# EAGLE board preampli (EAGLE 7.2.0)
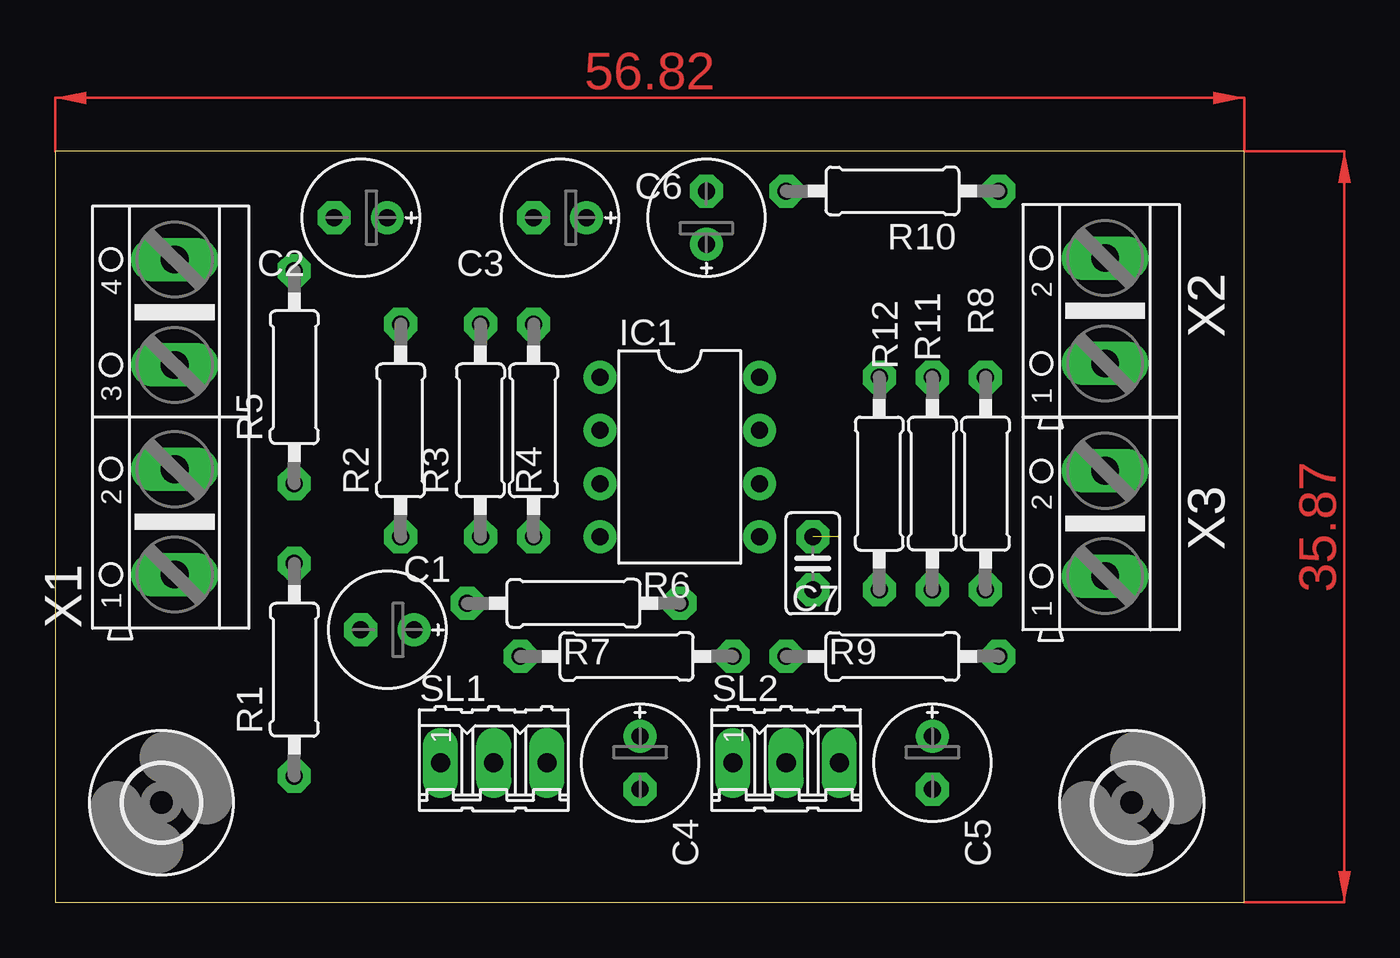
[diagram p0: board, top side]
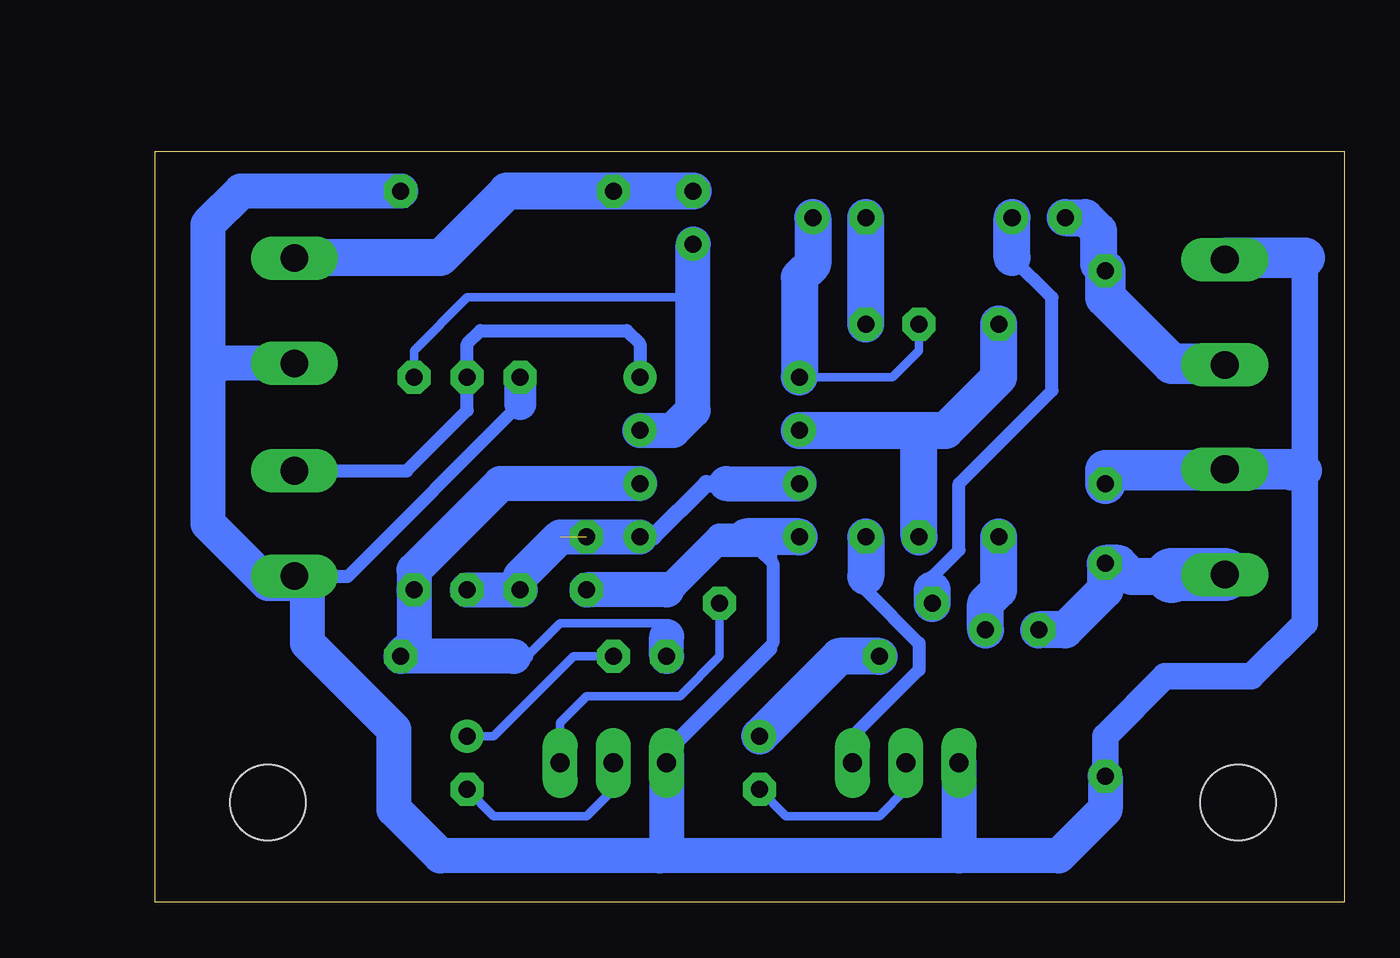
[diagram p1: board, bottom side, seen from below]

Size 56.82 x 35.87 mm. Coordinates in mm from the lower left corner, seen from the top.
Outline: 0,0 56.82,0 56.82,35.87 0,35.87 0,0
Copper layers (1*16): Top 0.035mm / dielectric 1.5mm / Bottom 0.035mm
Design rules "default *": minimum track width 10mil, minimum drill 24mil, track to track 8mil, track to pad 8mil, pad to pad 8mil, via to via 8mil, smd to smd 8mil, copper to edge 40mil, drill to drill 8mil, minimum pad ring 15mil, minimum via ring 15mil, stop-mask expansion 4mil, vias tented up to drill 0mil, thermal gap 10mil

## Footprints (pad centres in the part's own frame; a part is rotated, then mirrored left to right if it is on the bottom)
E2,5-6E = drill 0.813 pad 1.575: + -1.27,0 | drill 0.813 pad 1.575 octagon: - 1.27,0
C025-025X050 = drill 0.813 octagon: 1 -1.27,0; 2 1.27,0
3,6 = hole 3.6: 0,0
DIL08 = drill 0.813 pad 1.27: 1 -3.81,-3.81; 2 -1.27,-3.81; 3 1.27,-3.81; 4 3.81,-3.81; 5 3.81,3.81; 6 1.27,3.81; 7 -1.27,3.81; 8 -3.81,3.81
0207/10 = drill 0.813 octagon: 1 -5.08,0; 2 5.08,0
03P = drill 0.914 long: 1 -2.54,0; 2 0,0; 3 2.54,0
AK500/4 = drill 1.321 long: 1 -7.518,0; 2 -2.489,0; 3 2.489,0; 4 7.518,0
AK500/2 = drill 1.321 long: 1 -2.515,0; 2 2.515,0

## Placement (x,y rotation side)
C1  10uF  [E2,5-6E]  15.88,13.02 180 top
C2  10uF  [E2,5-6E]  14.61,32.7 180 top
C3  10uF  [E2,5-6E]  24.13,32.7 180 top
C4  10uF  [E2,5-6E]  27.94,6.67 270 top
C5  10uF  [E2,5-6E]  41.91,6.67 270 top
C6  10uF  [E2,5-6E]  31.11,32.7 90 top
C7  100nF  [C025-025X050]  36.2,16.19 270 top
E$1  [3,6]  51.44,4.76 0 top
E$2  [3,6]  5.08,4.76 0 top
IC1  LM4558N  [DIL08]  29.84,21.27 270 top
R1  1K  [0207/10]  11.43,11.11 90 top
R2  10K  [0207/10]  16.51,22.54 90 top
R3  220K  [0207/10]  20.32,22.54 90 top
R4  1K  [0207/10]  22.86,22.54 90 top
R5  10K  [0207/10]  11.43,25.08 90 top
R6  220K  [0207/10]  24.76,14.29 0 top
R7  10K  [0207/10]  27.3,11.75 0 top
R8  47K  [0207/10]  44.45,20 90 top
R9  10K  [0207/10]  40.01,11.75 0 top
R10  1K  [0207/10]  40.01,33.97 180 top
R11  100K  [0207/10]  41.91,20 90 top
R12  100K  [0207/10]  39.37,20 270 top
SL1  P1  [03P]  20.95,6.67 0 top
SL2  P2  [03P]  34.93,6.67 0 top
X1  [AK500/4]  5.71,23.18 90 top
X2  [AK500/2]  50.16,28.26 90 top
X3  [AK500/2]  50.16,18.1 90 top

## Library data of the parts
C1-C7 R1-R10 = rcl
E$1 E$2 = holes
IC1 = linear
R11 R12 = resistor
SL1 SL2 = con-amp-quick; OC_FARNELL: unknown; OC_NEWARK: unknown
X1-X3 = con-ptr500; OC_FARNELL: unknown; OC_NEWARK: unknown

## Nets
GND: C7.2 IC1.4 R1.1 R5.1 R10.1 R12.1 SL1.1 SL2.1 X1.2 X1.4 X2.1 X3.1
N$1: C2.- R5.2 X1.3
N$2: R4.1 SL1.3
N$3: C1.- R1.2 X1.1
N$4: C1.+ R2.1
N$5: IC1.2 R2.2 R3.1
N$6: C2.+ R6.1
N$7: IC1.8 R11.2 X3.2
N$8: C4.- SL1.2
N$9: R6.2 SL2.3
N$10: C3.- R4.2
N$11: C3.+ IC1.1 R3.2
N$12: C5.- SL2.2
N$13: C5.+ R9.1
N$14: C4.+ R7.1
N$15: IC1.6 R7.2 R8.1 R9.2
N$17: C6.- R10.2 X2.2
N$18: C6.+ IC1.7 R8.2
VCC2: C7.1 IC1.3 IC1.5 R11.1 R12.2

## Tracks (layer width: path | path; a pad name or v marks a point on that pad's centre or on a via)
GND
  Bottom 0.406: 49.53,15.56 50.14,15.56 X3.1 | C7.2 32.07,14.92 29.84,17.14 27.62,17.14 27.3,16.83 27.3,12.06 32.39,6.98
  Bottom 0.61: 39.37,23.81 47.62,15.56 49.53,15.56 | 32.39,14.92 31.75,14.92 29.84,16.83 27.94,16.83 27.3,16.19 27.3,12.38 32.39,7.3 32.39,6.98 SL2.1
  Bottom 1.27: 28.57,17.46 29.84,17.46 32.39,14.92 | R1.1 11.43,7.94 8.57,10.8 4.45,10.8 1.91,13.33 1.91,20.64 1.91,30.8
  Bottom 1.524: R12.1 39.37,23.81
  Bottom 1.676: 32.39,14.92 C7.2 | 2.54,20.64 1.91,20.64 | R1.1 11.43,4.45 13.65,2.22 18.41,2.22 | 18.41,2.22 32.7,2.22 | 32.7,2.22 43.18,2.22 45.4,4.45 45.4,8.25 49.53,12.38 49.53,15.56 | X2.1 53.63,25.74 53.66,25.72 54.29,25.72 | 54.29,25.72 54.29,18.1 51.44,15.24 50.51,15.24 X3.1 | R10.1 52.71,33.97 54.29,32.39 54.29,25.72 | SL1.1 18.41,2.22 | 32.39,6.98 32.39,2.54 32.7,2.22
  Bottom 1.778: IC1.4 28.57,17.46
  Bottom 1.93: 1.91,30.8 5.61,30.8 X1.4 | R5.1 11.43,20.64 5.77,20.64 X1.2 2.59,20.69 2.54,20.64
N$1
  Bottom 1.778: C2.- 12.38,32.7 11.75,32.07 11.75,30.48 R5.2
  Bottom 1.93: R5.2 11.43,28.89 8.26,25.72 5.77,25.72 X1.3
N$2
  Bottom 0.61: 22.86,15.56 22.86,14.92 20.32,12.38 20.32,11.11 23.49,7.94 SL1.3
  Bottom 1.778: R4.1 22.86,15.56
N$3
  Bottom 1.778: 8.26,15.56 10.16,15.56 10.79,16.19 R1.2 11.43,14.92 13.34,13.02 C1.-
  Bottom 2.54: X1.1 8.26,15.66 8.26,15.56
N$4
  Bottom 1.778: C1.+ 17.14,14.29 16.51,14.92 R2.1
N$5
  Bottom 1.778: IC1.2 20.32,22.54 | 20.32,22.54 19.05,22.54 16.51,25.08 R2.2 | R3.1 20.32,22.54
N$6
  Bottom 0.61: 19.68,14.92 19.68,15.56 18.41,16.83 18.41,20 13.97,24.45 13.97,28.89 15.88,30.8
  Bottom 1.778: R6.1 19.68,14.92 | 15.88,30.8 C2.+
N$7
  Bottom 0.61: X3.2 44.79,20.61 41.91,23.5 R11.2 41.91,26.67 41.27,27.3 34.29,27.3 33.66,26.67 IC1.8
N$8
  Bottom 0.406: SL1.2 20.95,5.4 22.22,4.13 26.67,4.13 C4.-
N$9
  Bottom 0.406: SL2.3 37.47,8.57 36.2,9.84 31.75,9.84 29.84,11.75 R6.2
N$10
  Bottom 1.778: R4.2 C3.-
N$11
  Bottom 0.406: IC1.1 21.59,25.08 20.32,26.35 R3.2
  Bottom 1.778: C3.+ 25.4,30.48 26.04,29.85 IC1.1
N$12
  Bottom 0.406: SL2.2 34.93,5.4 36.2,4.13 40.64,4.13 C5.-
N$13
  Bottom 0.406: C5.+ 40.64,7.94 36.83,11.75 R9.1
N$14
  Bottom 1.778: R7.1 24.13,11.75 C4.+
N$15
  Bottom 0.406: 32.39,12.7 32.39,13.33 37.47,13.33 39.05,11.75
  Bottom 0.61: 39.05,11.75 39.69,11.75
  Bottom 1.676: R7.2 32.39,12.7 | 39.69,11.75 R9.2 44.45,12.38 R8.1 44.45,15.88 40.32,20 IC1.6
N$17
  Bottom 1.778: C6.- R10.2 40.01,33.97 43.18,30.8 50.14,30.8 X2.2
N$18
  Bottom 0.406: C6.+ 31.11,28.89 41.91,28.89 44.45,26.35 R8.2
  Bottom 1.676: IC1.7 32.07,22.54 31.11,23.5 C6.+
VCC2  (1 unrouted)
  Bottom 0.813: IC1.5 33.02,17.46 30.48,20 29.53,20
  Bottom 1.676: R11.1 R12.2 39.37,15.56 37.47,17.46 IC1.5 | 29.53,20 IC1.3
(copper drawn outside any net)
  shapes: Top area x2